# EAGLE board d1 mini-1relay (EAGLE 7.6.0)
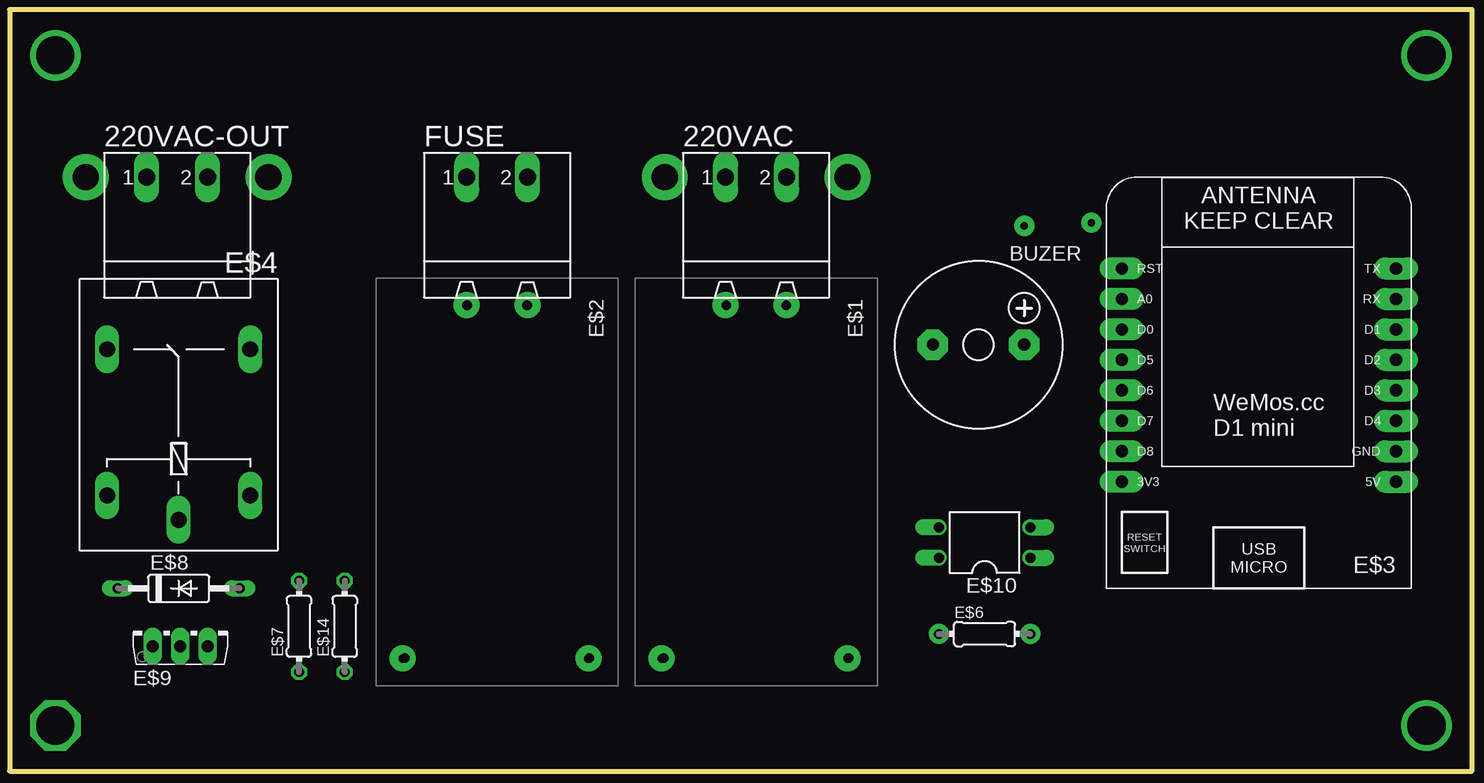
[diagram p0: board, top side]
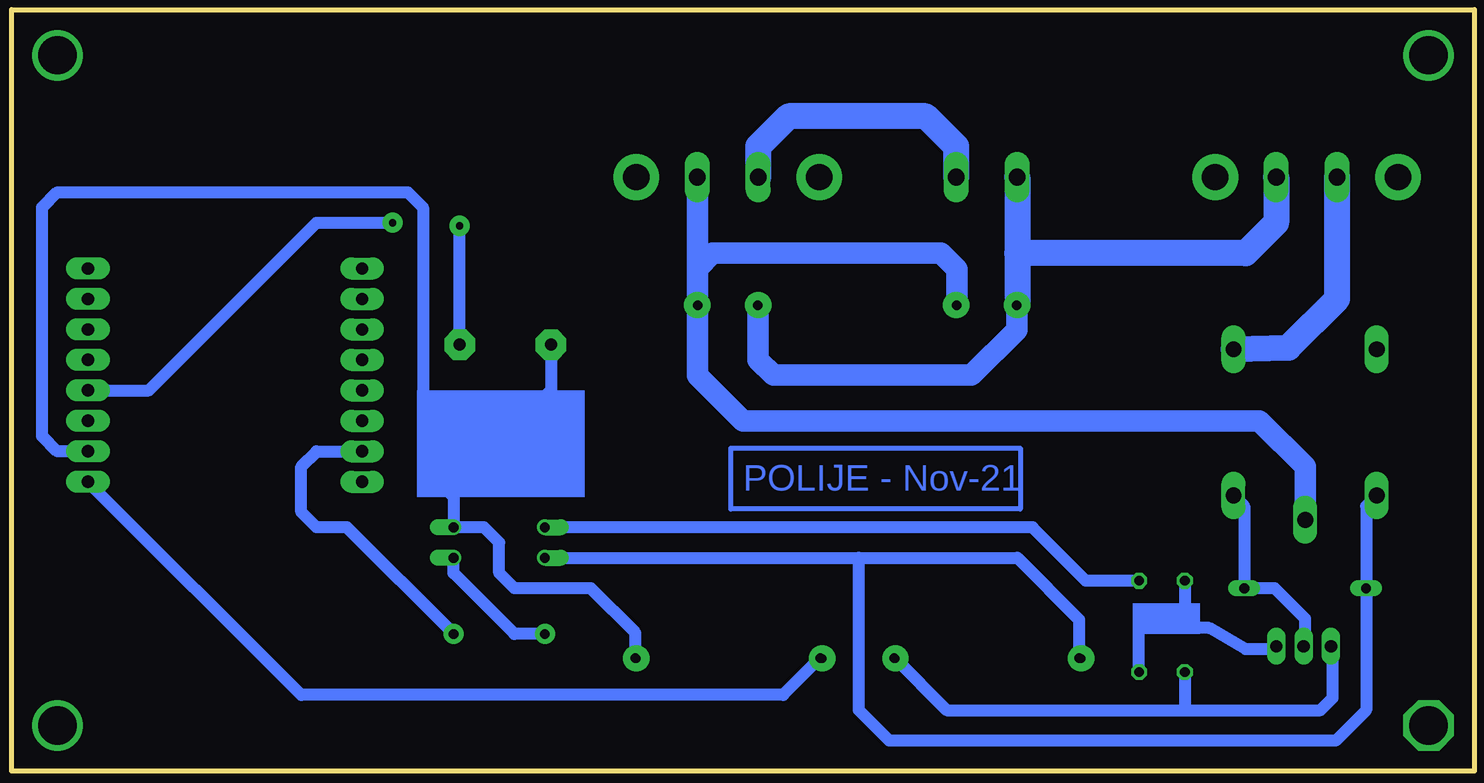
[diagram p1: board, bottom side, seen from below]

No outline drawn. Coordinates in mm, seen from the top.
Copper layers (1*16): Top 0.035mm / dielectric 1.5mm / Bottom 0.035mm
Design rules "default": minimum track width 10mil, minimum drill 24mil, track to track 8mil, track to pad 8mil, pad to pad 8mil, via to via 8mil, smd to smd 8mil, copper to edge 40mil, drill to drill 8mil, minimum pad ring 10mil, minimum via ring 8mil, stop-mask expansion 4mil, vias tented up to drill 0mil, thermal gap 10mil
Milling: 4 lines

## Footprints (pad centres in the part's own frame; a part is rotated, then mirrored left to right if it is on the bottom)
MSTBA2 = drill 1.397 long: 1 -2.54,5.08; 2 2.54,5.08
F/CM12P = drill 1.016 pad 2.54 octagon: + 3.81,0; - -3.81,0
HKLPM01 = drill 0.8 square: P$1 -14.7,2.5; P$2 -14.7,-2.5; P$3 14.7,7.7; P$4 14.7,-7.7
WEMOS-D1-MINI = drill 1.016 pad 1.829 long: 3V3 -10.16,-10.16; 5V 12.7,-10.16; A0 -10.16,5.08; D0 -10.16,2.54; D1 12.7,2.54; D2 12.7,0; D3 12.7,-2.54; D4 12.7,-5.08; D5 -10.16,0; D6 -10.16,-2.54; D7 -10.16,-5.08; D8 -10.16,-7.62; GND 12.7,-7.62; RESET -10.16,7.62; RX 12.7,5.08; TX 12.7,7.62
G5LE = drill 1.321 long: 1 -7.493,-5.969; 2 -7.493,5.969; O 4.699,5.969; P -9.525,0; S 4.699,-5.969
0204/7 = drill 0.813 octagon: 1 -3.81,0; 2 3.81,0
C2992 = drill 0.813 long: A 5.08,0; C -5.08,0
TO126V = drill 1.016 long: 1 -2.286,-1.27; 2 0,-1.27; 3 2.286,-1.27
DIL04 = drill 0.813 offset: 1 -1.27,-3.81; 2 1.27,-3.81; 3 1.27,3.81; 4 -1.27,3.81

## Placement (x,y rotation side)
220VAC  [MSTBA2]  30.48,54.61 0 top
220VAC-OUT  [MSTBA2]  -17.78,54.61 0 top
BUZER  [F/CM12P]  49.02,45.72 0 top
E$1  [HKLPM01]  30.48,34.29 270 top
E$2  [HKLPM01]  8.89,34.29 270 top
E$3  [WEMOS-D1-MINI]  71.12,44.45 0 top
E$4  [G5LE]  -17.65,40.64 90 top
E$6  [0204/7]  49.53,21.59 0 top
E$7  [0204/7]  -7.62,22.23 90 top
E$8  [C2992]  -17.65,25.4 0 top
E$9  [TO126V]  -17.53,21.84 0 top
E$10  [DIL04]  49.53,29.21 90 top
E$14  [0204/7]  -3.81,22.23 90 top
FUSE  [MSTBA2]  8.89,54.61 0 top

## Library data of the parts
220VAC 220VAC-OUT FUSE = con-phoenix-508
BUZER = buzzer
E$1 E$2 = HLKPM01EaglesLib
E$3 = esp8266modules
E$4 = relay
E$6 E$7 E$14 = resistor
E$8 = diode
E$9 = transistor
E$10 = optocoupler

## Nets
S$1: E$6.1 E$10.1
S$2: BUZER.- E$1.P$3 E$3.GND E$10.2
S$3: E$1.P$4 E$3.5V
S$4: E$4.1 E$8.A
S$5: 220VAC.2 E$1.P$1 E$2.P$1 E$4.P
S$6: E$3.D3
S$7: 220VAC-OUT.2 E$1.P$2 E$2.P$2 FUSE.1
S$8: 220VAC-OUT.1 E$4.S
S$9: 220VAC.1 FUSE.2
S$10: E$10.3 E$14.2
S$11: E$2.P$3 E$7.1
S$12: E$2.P$4 E$4.2 E$8.C E$10.4
S$13: BUZER.+
S$14: E$3.D8 E$6.2
S$16: E$7.2 E$14.1

## Tracks (layer width: path | path; a pad name or v marks a point on that pad's centre or on a via)
S$1
  Bottom 1.016: E$6.1 48.26,21.59 53.34,26.67 E$10.1
S$2
  Bottom 1.016: E$3.GND 86.36,36.83 87.63,38.1 87.63,57.15 86.36,58.42 57.15,58.42 55.88,57.15 55.88,36.32 | 38.1,19.67 E$1.P$3 38.18,21.67 41.91,25.4 48.26,25.4 49.53,26.67 49.53,29.21 50.8,30.48 E$10.2 53.34,33.02 55.88,35.56 55.88,36.32 | BUZER.- 45.21,41.91 49.53,38.1 55.12,38.1 55.88,36.32
S$3
  Bottom 1.016: E$1.P$4 25.86,16.51 66.04,16.51 E$3.5V
S$4
  Bottom 1.016: -17.65,20.32 -17.65,22.86 -15.11,25.4 E$8.A -12.57,32.26 E$4.1
S$5
  Bottom 1.016: 33.02,58.42 220VAC.2
  Bottom 1.778: E$2.P$1 11.39,52.03 12.7,53.34 31.75,53.34 33.02,52.07 | 33.02,52.07 33.02,49.03 E$1.P$1 32.98,43.14 29.21,39.37 -13.84,39.37 -17.65,35.56 E$4.P | 33.02,58.42 33.02,52.07
S$6  (via drill 0.6 pad 1.68)
  Bottom 1.016: E$3.D3 78.74,41.91 64.77,55.88 v58.42,55.88
  other vias: 53.34,21.59
S$7
  Bottom 1.778: 6.35,49.03 E$2.P$2 6.39,46.95 10.16,43.18 26.67,43.18 27.94,44.45 27.94,48.95 E$1.P$2
  Bottom 2.184: FUSE.1 6.35,53.34 | 6.35,53.34 6.35,49.03 | 220VAC-OUT.2 -15.24,55.88 -12.7,53.34 6.35,53.34
S$8
  Bottom 2.184: E$4.S -16.26,45.47 -20.32,49.53 220VAC-OUT.1
S$9
  Bottom 2.184: FUSE.2 11.43,62.23 13.97,64.77 25.4,64.77 27.94,62.23 220VAC.1
S$10
  Bottom 1.016: E$14.2 0.64,26.04 5.08,30.48 E$10.3
S$11
  Bottom 1.016: E$2.P$3 12.24,15.24 -7.62,15.24 | -7.62,15.24 -18.92,15.24 -19.94,16.26 -19.94,20.32 | E$7.1 -7.62,15.24
S$12
  Bottom 1.016: E$10.4 19.56,27.94 | 19.56,27.94 6.35,27.94 1.19,22.78 E$2.P$4 | E$4.2 -22.73,32.26 E$8.C -22.73,15.24 -20.19,12.7 17.02,12.7 19.56,15.24 19.56,27.94
S$13  (via drill 0.6 pad 1.68)
  Bottom 1.016: BUZER.+ v52.83,55.63
  other vias: 58.42,55.88 45.72,21.59
S$14
  Bottom 1.016: E$6.2 62.23,30.48 64.77,30.48 66.04,31.75 66.04,35.56 64.77,36.83 E$3.D8
S$15
  Bottom 0.406: 6.1,37.08 6.1,32 30.23,32 30.23,37.08 6.1,37.08
S$16
  Bottom 1.016: E$14.1 -3.81,22.1 | -3.81,22.1 -3.81,22.23 | -15.37,20.32 -12.7,20.32 -9.65,22.1 -7.62,22.1 | -7.62,22.1 -3.81,22.1 | E$7.2 -7.62,22.1
S$18  (via drill 3.2 pad 3.81)
  other vias: 86.36,69.85
S$19  (via drill 3.2 pad 3.81)
  other vias: 86.36,13.97
S$20  (via drill 3.2 pad 3.81)
  other vias: -27.94,13.97
S$21  (via drill 0.7 pad 2.18, 2.2 pad 3.81, 3.2 pad 3.81)
  other vias: -27.94,69.85 6.35,49.02 -10.16,59.69 -25.4,59.69 22.86,59.69 38.1,59.69 38.1,19.56 1.02,19.56 22.61,19.56 16.51,19.56 33.02,49.02 27.94,49.02 11.43,49.02
(copper drawn outside any net)
  shapes: Bottom area x2

## Text on the board
Bottom: POLIJE - Nov-21